# Altium PCB QSTL_MicroDSUB_Plug_FFC.PcbDoc
Units mm, origin at the board's own origin, x right, y up, seen from the top; angles counter-clockwise.
Board outline 23 x 32 mm, 4 copper layers (Top Layer, Layer 1, Layer 2, Bottom Layer), stack 0.603 mm thick; 4 components, 27 nets, 84 pads, 103 vias.
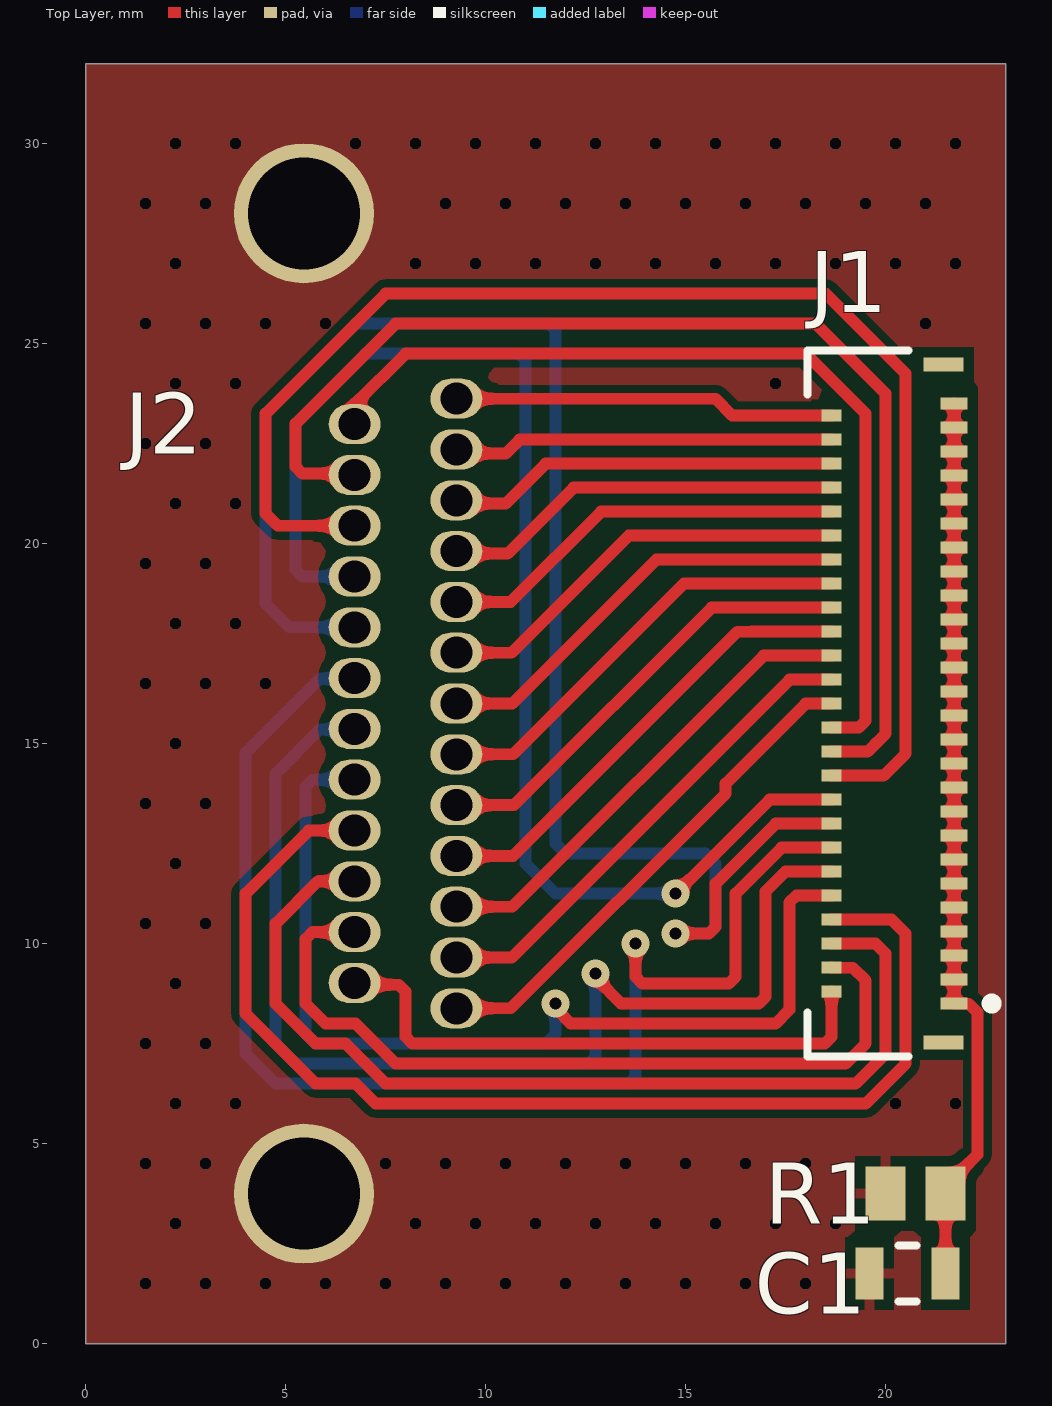
[diagram p0: Top Layer view]
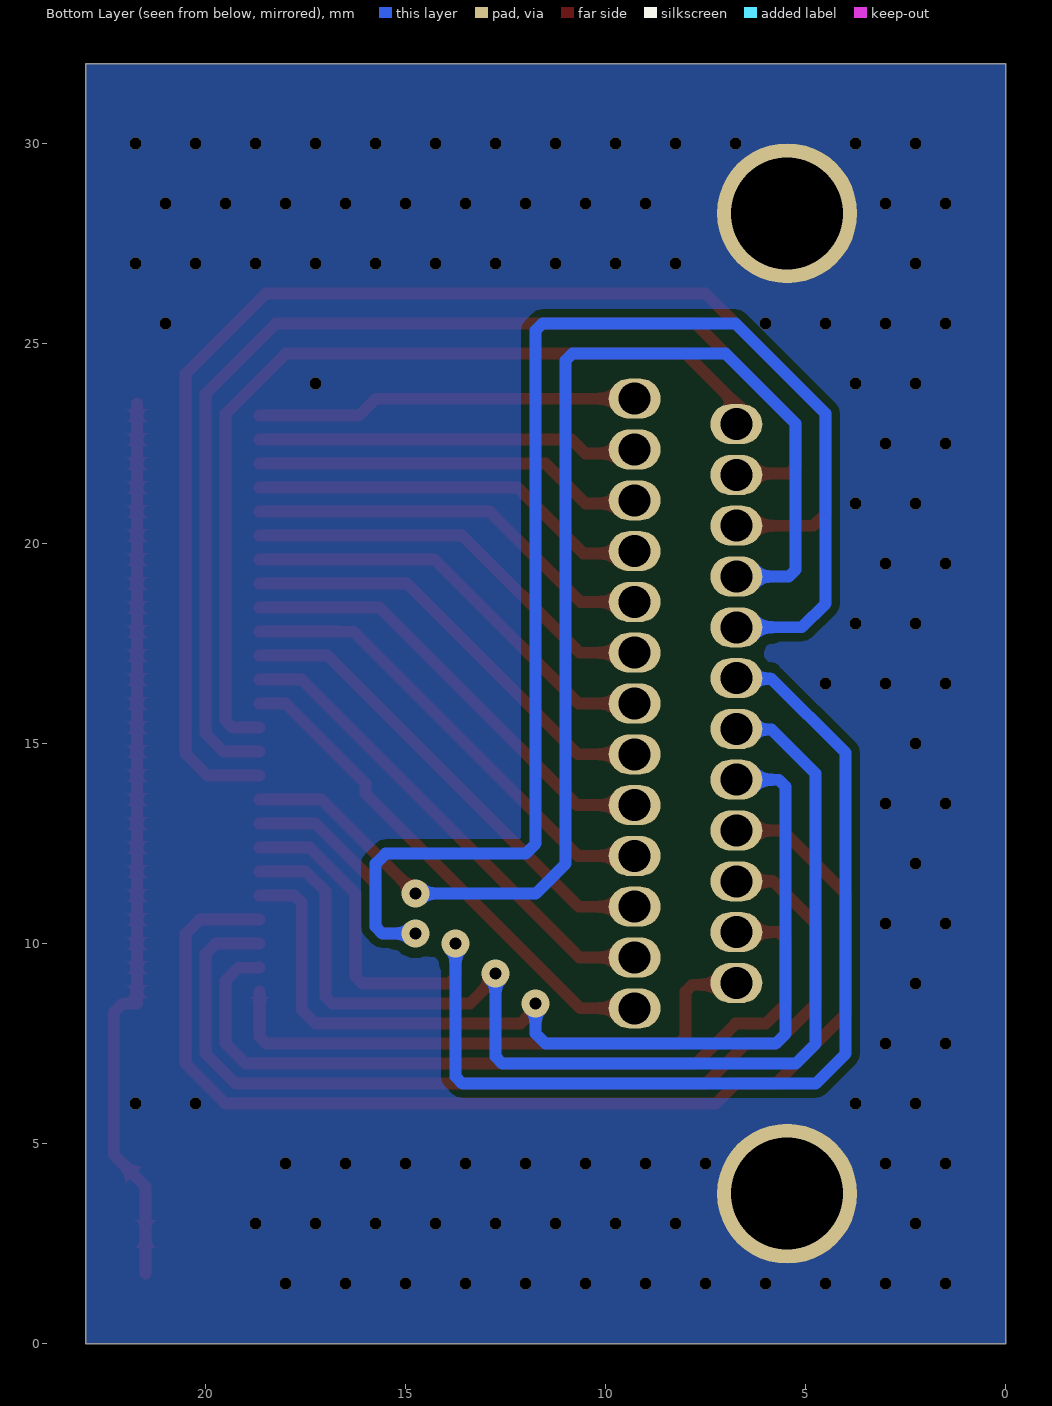
[diagram p1: Bottom Layer view, seen from below]
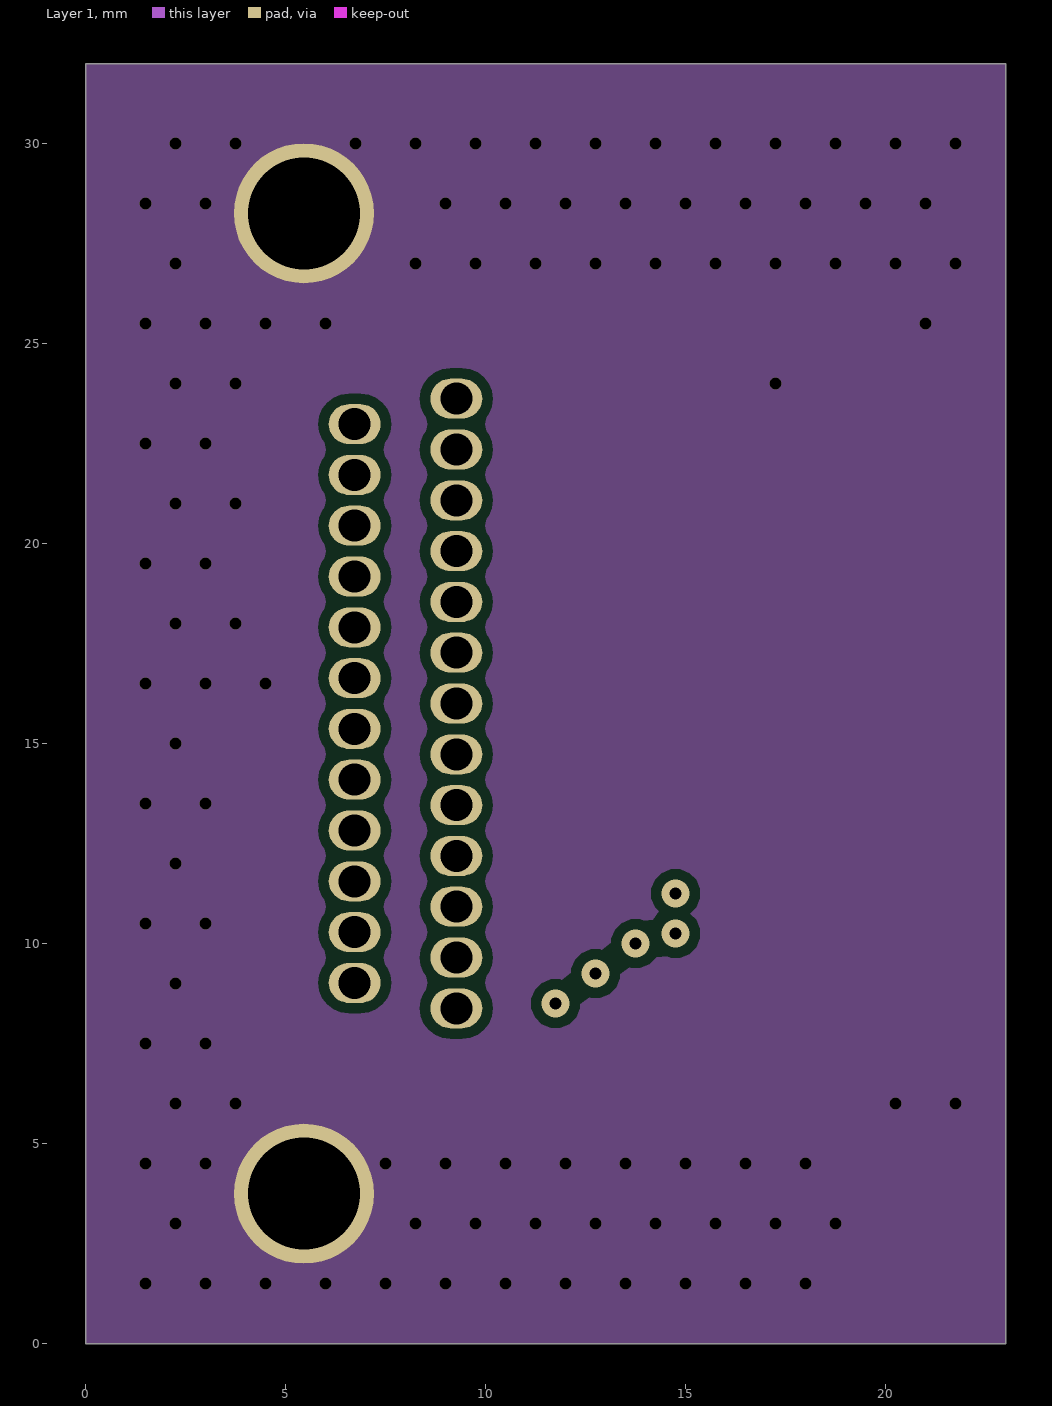
[diagram p2: Layer 1]
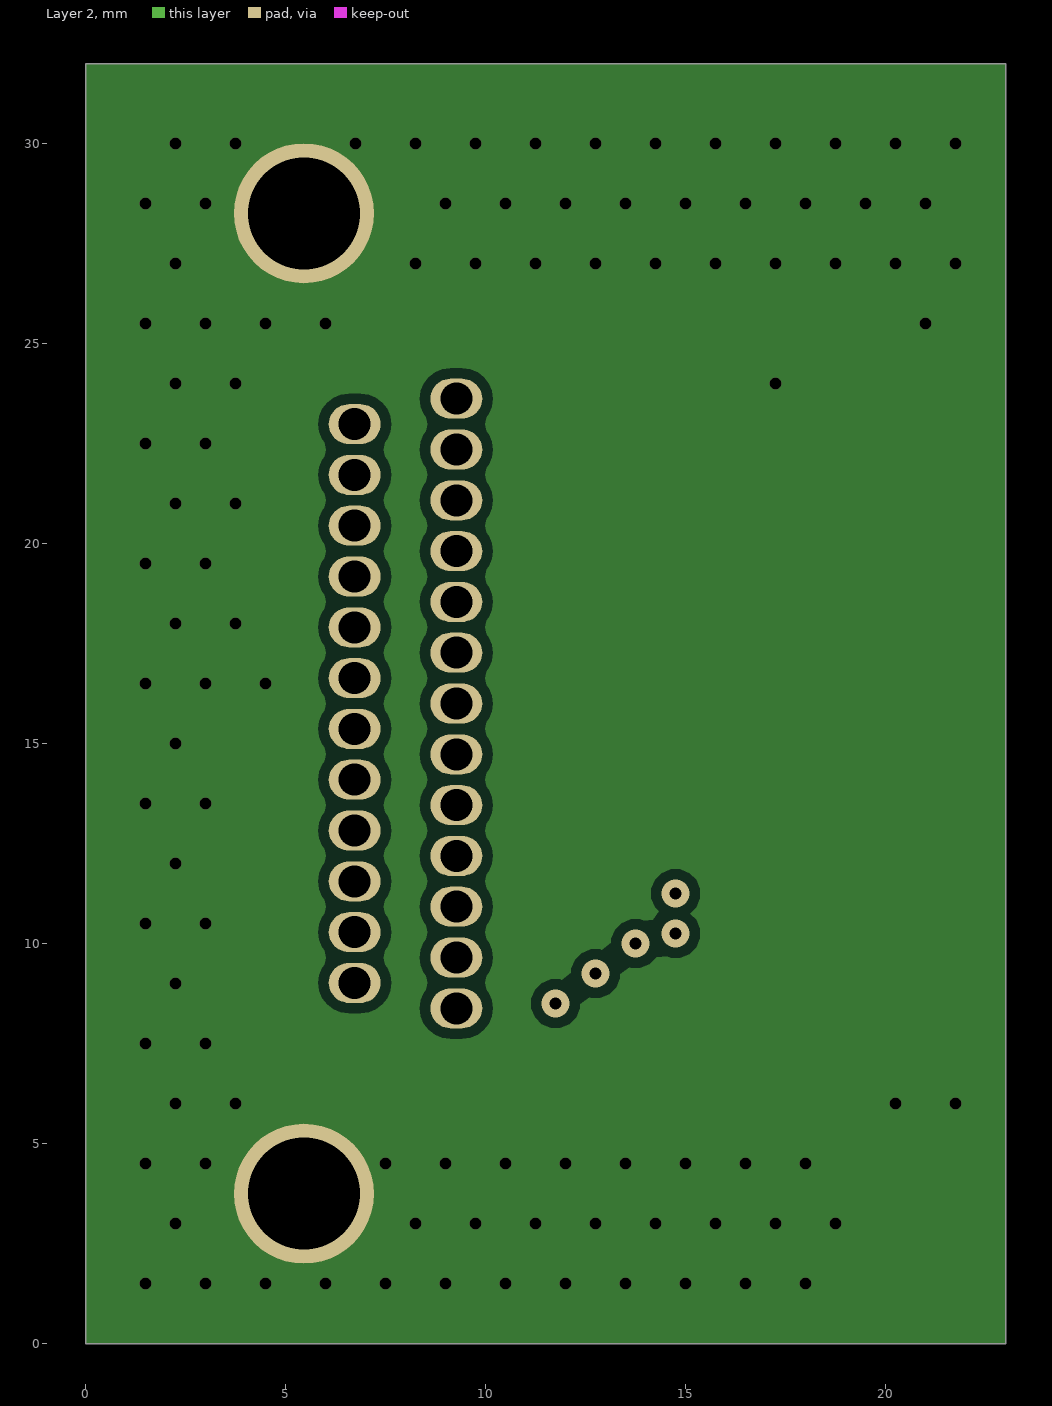
[diagram p3: Layer 2]

## Layer stack, top to bottom
Top Solder: solder mask 0.0102, Solder Resist, Dk 3.5
Top Layer: signal copper 0.0356
Dielectric 2: prepreg 0.0711, PP-006, Dk 4.1
Layer 1: signal copper 0.035
Dielectric 1: dielectric 0.32, FR-4, Dk 4.8
Layer 2: signal copper 0.035
Dielectric 3: prepreg 0.0711, PP-006, Dk 4.1
Bottom Layer: signal copper 0.0356
Bottom Solder: solder mask 0.0102, Solder Resist, Dk 3.5

## Board outline
0,0 23,0 23,32 0,32

## Design rules (kind name [scope] priority, off if disabled: settings)
Clearance [All] p1: gap=0.254 ignorepadtopadclearanceinfootprint=FALSE except(0.2: Arc-Arc Arc-Track Arc-SMDPad Arc-THPad Arc-Via Arc-Fill Arc-Poly Arc-Region Arc-Text Arc-Hole Track-Track Track-SMDPad Track-THPad Track-Via Track-Fill Track-Poly Track-Region Track-Text Track-Hole)
PolygonConnect [All] p1: connectstyle=Relief reliefconductorwidth=0.254 reliefentries=4 polygonreliefangle="90 Angle" airgapwidth=0.254
RoutingVias [All] p1: holewidth=0.3 width=0.3 viastyle="Through Hole" minholewidth=0.3 minwidth=0.3 maxholewidth=0.711 maxwidth=1.27
SolderMaskExpansion [All] p1: expansion=0.102 istentingtop=FALSE
SupplyNets "Schematic Supply Nets" [InNet('GND')] p1: voltage=0.000
Width [All] p1: maxlimit=0.3 minlimit=0.254 preferedwidth=0.294 midlayer1_maxwidth=0.254 midlayer1_prefwidth=0.254 midlayer2_maxwidth=0.254 midlayer2_prefwidth=0.254 minimp=50.000000 maximp=50.000000 favimp=50.000000
30 further rules are at their usual default settings.

## Components (designator, comment, footprint, x,y, rotation, side; value= is the part's Value field where it differs from the comment)
C1 "Murata 0805" FP-GRM21B-0_15-MFG 20.55,1.75 r180 top locked
J1 "5025985193" FP-5025985193-MFG 20,16 r90 top locked
J2 "Micro DSUB RA" 581-M25-113L461 8,16 r270 top locked
R1 "Panasonic 0805" RESC2013X60X40LL20T25 20.75,3.75 r180 top locked

## Footprints (in the part's own frame and the unit in brackets; to place one, negate y for a bottom-side part, rotate by r counter-clockwise, add the part's x,y. Pads: shape width x height; smd on the part's side, far side on the other; paste and mask are expansions set on the pad)
581-M25-113L461 [mm] "https://www.digikey.com/en/products/detail/norcomp-inc/581-M25-113L461/13557494"
  oval 1x1.3 hole 0.8: 1(-7.62,1.27) 2(-6.35,1.27) 3(-5.08,1.27) 4(-3.81,1.27) 5(-2.54,1.27) 6(-1.27,1.27) 7(0,1.27) 8(1.27,1.27) 9(2.54,1.27) 10(3.81,1.27) 11(5.08,1.27) 12(6.35,1.27) 13(7.62,1.27) 14(-6.985,-1.27) 15(-5.715,-1.27) 16(-4.445,-1.27) 17(-3.175,-1.27) 18(-1.905,-1.27) 19(-0.635,-1.27) 20(0.635,-1.27) 21(1.905,-1.27) 22(3.175,-1.27) 23(4.445,-1.27) 24(5.715,-1.27) 25(6.985,-1.27)
  round 3.5 hole 2.8: SH1(-12.255,-2.54) SH2(12.255,-2.54)
  body extent -15.07,-12.82 15.03,2.25, height 7.9
FP-5025985193-MFG [mm]
  rect 0.3x0.67 smd paste+0 mask+0: 1(-7.5,-1.715) 3(-6.9,-1.715) 5(-6.3,-1.715) 7(-5.7,-1.715) 9(-5.1,-1.715) 11(-4.5,-1.715) 13(-3.9,-1.715) 15(-3.3,-1.715) 17(-2.7,-1.715) 19(-2.1,-1.715) 21(-1.5,-1.715) 23(-0.9,-1.715) 25(-0.3,-1.715) 27(0.3,-1.715) 29(0.9,-1.715) 31(1.5,-1.715) 33(2.1,-1.715) 35(2.7,-1.715) 37(3.3,-1.715) 39(3.9,-1.715) 41(4.5,-1.715) 43(5.1,-1.715) 45(5.7,-1.715) 47(6.3,-1.715) 49(6.9,-1.715) 51(7.5,-1.715)
  rect 0.3x0.5 smd paste+0 mask+0: 2(-7.2,1.35) 4(-6.6,1.35) 6(-6,1.35) 8(-5.4,1.35) 10(-4.8,1.35) 12(-4.2,1.35) 14(-3.6,1.35) 16(-3,1.35) 18(-2.4,1.35) 20(-1.8,1.35) 22(-1.2,1.35) 24(-0.6,1.35) 26(0,1.35) 28(0.6,1.35) 30(1.2,1.35) 32(1.8,1.35) 34(2.4,1.35) 36(3,1.35) 38(3.6,1.35) 40(4.2,1.35) 42(4.8,1.35) 44(5.4,1.35) 46(6,1.35) 48(6.6,1.35) 50(7.2,1.35)
  rect 0.35x1 smd paste+0 mask+0: 52(-8.475,-1.45) 53(8.475,-1.45)
  silkscreen extent -8.83,-2.78 8.82,1.95
FP-GRM21B-0_15-MFG [mm]
  rect 0.7x1.3 smd paste+0 mask+0: 1(-0.95,0) 2(0.95,0)
  silkscreen extent -0.23,-0.7 0.23,0.7, body extent -1,-0.63 1,0.63, height 1.4
RESC2013X60X40LL20T25 [mm] "Chip Resistor, 2-Leads, Body 2.00x1.25mm, IPC High Density"
  rect 1x1.35 smd: 1(-0.75,0) 2(0.75,0)
  body extent -1.1,-0.72 1.1,0.72, height 0.6

## Part data
C1: library part CMP-2000-07555-2, "Chip Multilayer Ceramic Capacitors for General Purpose, 0805, 10uF, X7R, 15%, 10%, 10V", Capacitance=10uF, Case Code (Imperial)=0805, Case Code (Metric)=2012, Dielectric=X7R, Max Operating Temperature=125°C, Min Operating Temperature=-55°C, Package Quantity=3000, Tolerance=10%, Voltage Rating=10V, Case/Package=0805, Depth=1.25mm, Height=1.25mm, Length=2mm, Mount="Surface Mount", Packaging="Tape and Reel", REACH SVHC="No SVHC", Termination=SMD/SMT, Thickness=0.055inch, Voltage Rating (DC)=10V, Weight=0.000335oz, Width=1.25mm
J1: library part CMP-1241-00093-2, "CONN FPC 51POS 0.30MM R/A", Ambient Temperature Range High=+105°C, Ambient Temperature Range Low=-40°C, Current Rating=0.3A, Manufacturer=Molex, Package=0, Temperature="-40°C to +105°C", Voltage Rating=50V, Automotive=No, Category=Conn, Ciiva Ids=8412513, ComponentLink2Description=Datasheet, ComponentLink2URL=https://www.molex.com/webdocs/datasheets/pdf/en-us/5025985193_FFC_FPC_CONNECTORS.pdf, Conn Gender=Female, Conn Orientation="Right Angle", Contact Material=Gold,Nickel, Device Class L1=Connectors, Device Class L2="FFC / FPC", Device Class L3=unset, Digikey Description="CONN FPC 51POS 0.30MM R/A", Footprint Url=https://www.molex.com/pdm_docs/sd/5025985193_sd.pdf, Height=1.83mm, Import Ts=1521860080, Is Female=yes, Lead Free=Yes, Manufacturer Part Number=5025985193, Mouser Description="FFC & FPC Connectors 0.3 FPC BackFlip Hsg RA SMT 51Ckt", Number of Contacts=51, Octopart=https://octopart.com/502598-5193-molex-33127991, Pitch=0.6mm, Release Date=1411372322, RoHS=TRUE, Temperature Range High=+105°C, Temperature Range Low=-40°C
J2: library part 581-M25-113L461, "https://www.digikey.com/en/products/detail/norcomp-inc/581-M25-113L461/13557494"
R1: library part CMP-2001-00613-1, Manufacturer=Panasonic, Part Number=ERA6AEB222V

## Via types
v1: diameter 0.3, hole 0.3, Top Layer to Bottom Layer, tented both sides, 98 vias
v2: diameter 0.7, hole 0.3, Top Layer to Bottom Layer, tented both sides, 5 vias

## Nets (pads, with @x,y where several pads share a name; then routed paths per layer and width w, separated by ;. In a path a pad name is that pad's centre, name@x,y a point inside that pad or via, vN(x,y) a via of type N, cw(c..) or ccw(c..) an arc to the next point about the centre after c; other vN are vias at no path point)
1: J1.50 J2.1 | length 9.6
  Top Layer w0.294: J2.1 15.75,23.62 16.17,23.2 J1.50
2: J1.48 J2.2 | length 9.6
  Top Layer w0.294: J2.2@9.226,22.25 10.5,22.25 10.85,22.6 J1.48
3: J1.46 J2.3 | length 9.9
  Top Layer w0.294: J2.3@9.205,21 10.5,21 11.5,22 J1.46
4: J1.44 J2.4 | length 9.9
  Top Layer w0.294: J2.4@9.384,19.75 10.55,19.75 12.2,21.4 J1.44
5: J1.42 J2.5 | length 10.3
  Top Layer w0.294: J2.5 10.63,18.54 12.89,20.8 J1.42
6: J1.40 J2.6 | length 10.6
  Top Layer w0.294: J2.6 10.65,17.27 13.58,20.2 J1.40
7: J1.38 J2.7 | length 10.9
  Top Layer w0.294: J2.7 10.67,16 14.27,19.6 J1.38
8: J1.36 J2.8 | length 11.1
  Top Layer w0.294: J2.8 10.69,14.73 14.96,19 J1.36
9: J1.34 J2.9 | length 11.4
  Top Layer w0.294: J2.9 10.71,13.46 15.65,18.4 J1.34
10: J1.32 J2.10 | length 11.7
  Top Layer w0.294: J2.10 10.69,12.19 16.297,17.797 16.647,17.797 16.65,17.8 J1.32
11: J1.30 J2.11 | length 12
  Top Layer w0.294: J2.11 10.67,10.92 16.95,17.2 J1.30
12: J1.28 J2.12 | length 12.3
  Top Layer w0.294: J2.12 10.65,9.65 17.6,16.6 J1.28
13: J1.26 J2.13 | length 12.7
  Top Layer w0.294: J2.13 10.63,8.38 16,13.75 16,14 18,16 J1.26
14: J1.24 J2.14 | length 23
  Top Layer w0.294: J2.14 6.73,23.48 8,24.75 18,24.75 19.5,23.25 19.5,15.572 19.328,15.4 J1.24
15: J1.22 J2.15 | length 29.2
  Top Layer w0.294: J2.15@6.73,21.75 5.422,21.75 5.25,21.922 5.25,23 7.75,25.5 18.25,25.5 20,23.75 20,15.25 19.75,15 19.55,14.8 J1.22
16: J1.20 J2.16 | length 34.5
  Top Layer w0.294: J2.16 4.805,20.445 4.5,20.75 4.5,23.25 7.5,26.25 18.5,26.25 20.5,24.25 20.5,14.75 19.95,14.2 J1.20
17: J1.18 J2.17 | length 33.3
  Top Layer w0.294: v2(14.75,11.25) 17.1,13.6 J1.18
  Bottom Layer w0.294: J2.17 5.422,19.175 5.25,19.347 5.25,23 7,24.75 10.828,24.75 11,24.578 11,12 11.75,11.25 v2(14.75,11.25)
18: J1.16 J2.18 | length 40.8
  Top Layer w0.294: v2(14.75,10.25) 15.578,10.25 15.75,10.422 15.75,11.5 17.25,13 J1.16
  Bottom Layer w0.294: J2.18 5.095,17.905 4.5,18.5 4.5,23.25 6.75,25.5 11.578,25.5 11.75,25.328 11.75,12.5 12,12.25 15.5,12.25 15.75,12 15.75,10.422 15.578,10.25 v2(14.75,10.25)
19: J1.14 J2.19 | length 32.9
  Top Layer w0.294: v2(13.75,10) 13.75,9.172 13.922,9 16.078,9 16.25,9.172 16.25,11.25 17.4,12.4 J1.14
  Bottom Layer w0.294: J2.19 6.716,16.621 5.851,16.621 4,14.77 4,7.25 4.75,6.5 13.578,6.5 13.75,6.672 v2(13.75,10)
20: J1.12 J2.20 | length 28.7
  Top Layer w0.294: v2(12.75,9.25) 12.75,9.14 13.39,8.5 16.828,8.5 17,8.672 17,11.301 17.499,11.8 J1.12
  Bottom Layer w0.294: J2.20 6.716,15.351 5.851,15.351 4.75,14.25 4.75,7.5 5.25,7 12.578,7 12.75,7.172 v2(12.75,9.25)
21: J1.10 J2.21 | length 24.8
  Top Layer w0.294: v2(11.75,8.5) 11.75,8.39 11.953,8.187 11.953,8.172 12.125,8 17.25,8 17.597,8.347 17.597,11.028 17.769,11.2 J1.10
  Bottom Layer w0.294: J2.21 5.672,14.095 5.5,13.923 5.5,7.75 5.75,7.5 11.5,7.5 11.75,7.75 v2(11.75,8.5)
22: J1.8 J2.22 | length 29.5
  Top Layer w0.294: J2.22 5.575,12.825 4,11.25 4,8.25 5.75,6.5 6.75,6.5 7.25,6 19.5,6 20.5,7 20.5,10.25 20.15,10.6 J1.8
23: J1.6 J2.23 | length 24.8
  Top Layer w0.294: J2.23 5.805,11.555 4.75,10.5 4.75,8.5 5.75,7.5 6.5,7.5 7.5,6.5 19.25,6.5 20,7.25 20,9.75 19.75,10 J1.6
24: J1.4 J2.24 | length 20.3
  Top Layer w0.294: J2.24 5.672,10.285 5.5,10.113 5.5,8.5 6,8 6.75,8 7.75,7 19,7 19.5,7.5 19.5,9.078 19.181,9.397 18.653,9.397 J1.4
25: J1.2 J2.25 | length 14.4
  Top Layer w0.294: J2.25 6.775,8.97 7.828,8.97 8,8.798 8,7.672 8.172,7.5 18.478,7.5 18.65,7.672 J1.2
GND: C1.2 J2.SH1 J2.SH2 R1.2
  other v1: 1.5,1.5 3,1.5 4.5,1.5 6,1.5 7.5,1.5 9,1.5 10.5,1.5 12,1.5 13.5,1.5 15,1.5 16.5,1.5 18,1.5 2.25,3 8.25,3 9.75,3 11.25,3 12.75,3 14.25,3 15.75,3 17.25,3 18.75,3 1.5,4.5 3,4.5 7.5,4.5 9,4.5 10.5,4.5 12,4.5 13.5,4.5 15,4.5 16.5,4.5 18,4.5 2.25,6 3.75,6 20.25,6 21.75,6 1.5,7.5 3,7.5 2.25,9 1.5,10.5 3,10.5 2.25,12 1.5,13.5 3,13.5 2.25,15 1.5,16.5 3,16.5 4.5,16.5 2.25,18 3.75,18 1.5,19.5 3,19.5 2.25,21 3.75,21 1.5,22.5 3,22.5 2.25,24 3.75,24 17.25,24 1.5,25.5 3,25.5 4.5,25.5 6,25.5 21,25.5 2.25,27 8.25,27 9.75,27 11.25,27 12.75,27 14.25,27 15.75,27 17.25,27 18.75,27 20.25,27 21.75,27 1.5,28.5 3,28.5 9,28.5 10.5,28.5 12,28.5 13.5,28.5 15,28.5 16.5,28.5 18,28.5 19.5,28.5 21,28.5 2.25,30 3.75,30 6.75,30 8.25,30 9.75,30 11.25,30 12.75,30 14.25,30 15.75,30 17.25,30 18.75,30 20.25,30 21.75,30
NetC1_1: C1.1 J1.1 J1.3 J1.5 J1.7 J1.9 J1.11 J1.13 J1.15 J1.17 J1.19 J1.21 J1.23 J1.25 J1.27 J1.29 J1.31 J1.33 J1.35 J1.37 J1.39 J1.41 J1.43 J1.45 J1.47 J1.49 J1.51 R1.1 | length 22.5
  Top Layer w0.294: C1.1 R1.1 21.5,3.925 22.297,4.722 22.297,8.278 22.078,8.497 21.718,8.497 J1.1 J1.3 J1.5 J1.7 J1.9 J1.11 J1.13 J1.15 J1.17 J1.19 J1.21 J1.23 J1.25 J1.27 J1.29 J1.31 J1.33 J1.35 J1.37 J1.39 J1.41 J1.43 J1.45 J1.47 J1.49 J1.51
pads on no net: J1.52 J1.53

## Polygon pours and split planes (outlines as drawn)
GND on Layer 1 "NONET_L03_P-001" (solid, remove dead copper, pour order 4): 0,0 23,0 23,32 0,32
GND on Layer 2 "NONET_L03_P-001" (solid, remove dead copper, pour order 6): 0,0 23,0 23,32 0,32
no net on Top Solder "NONET_L03_P-001" (solid): 12,27 12,5 16,5 16,27
no net on Top Solder "NONET_L03_P-001" (solid): 0,26 3,26 3,6 0,6
no net on Top Solder "NONET_L03_P-001" (solid): 0,6 6,6 7,5 17,5 17,0 0,0
no net on Top Solder "NONET_L03_P-001" (solid): 0,32 0,26 6,26 7,27 23,27 23,32
no net on Bottom Solder "NONET_L03_P-001" (solid): 12,26 12,6 23,6 23,26
no net on Bottom Solder "NONET_L03_P-001" (solid): 0,26 4,26 4,6 0,6
no net on Bottom Solder "NONET_L03_P-001" (solid): 0,6 23,6 23,0 0,0
no net on Bottom Solder "NONET_L03_P-001" (solid): 0,32 23,32 23,26 0,26
GND on Top Layer "NONET_L03_P-001" (solid, remove dead copper, pour order 5): 0,0 23,0 23,32 0,32
GND on Bottom Layer "NONET_L03_P-001" (solid, remove dead copper, pour order 7): 0,0 23,0 23,32 0,32

## Silkscreen, mask and mechanical layers (free items; w line width, h text height)
Mechanical 1:
  the board outline again, w0.232